# Altium PCB KhoaSoDienTu.PcbDoc
Units mm, origin at the board's own origin, x right, y up, seen from the top; angles counter-clockwise.
Board outline 110.74 x 92.46 mm, 2 copper layers (Top Layer, Bottom Layer); 26 components, 29 nets, 102 pads, 175 vias.
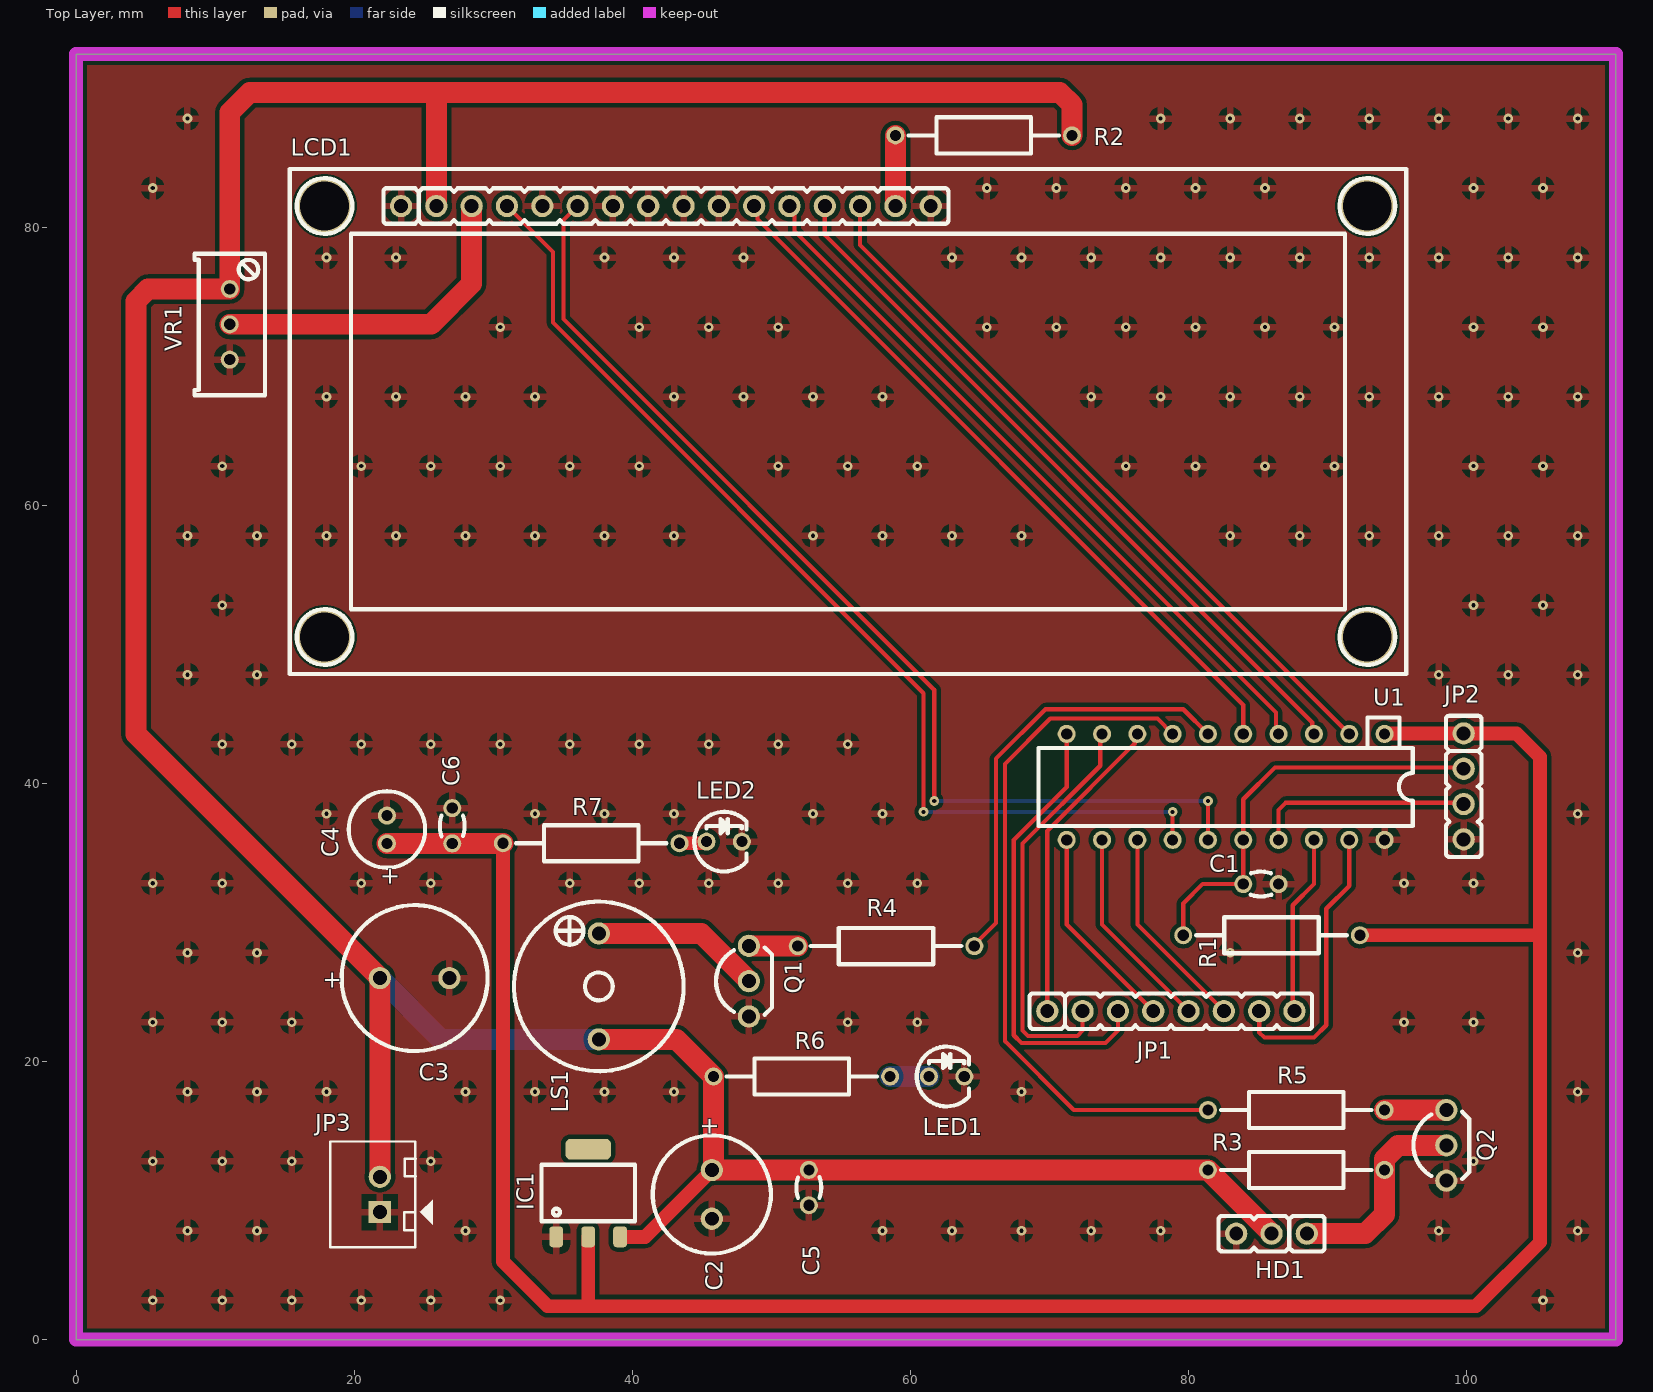
[diagram p0: Top Layer view]
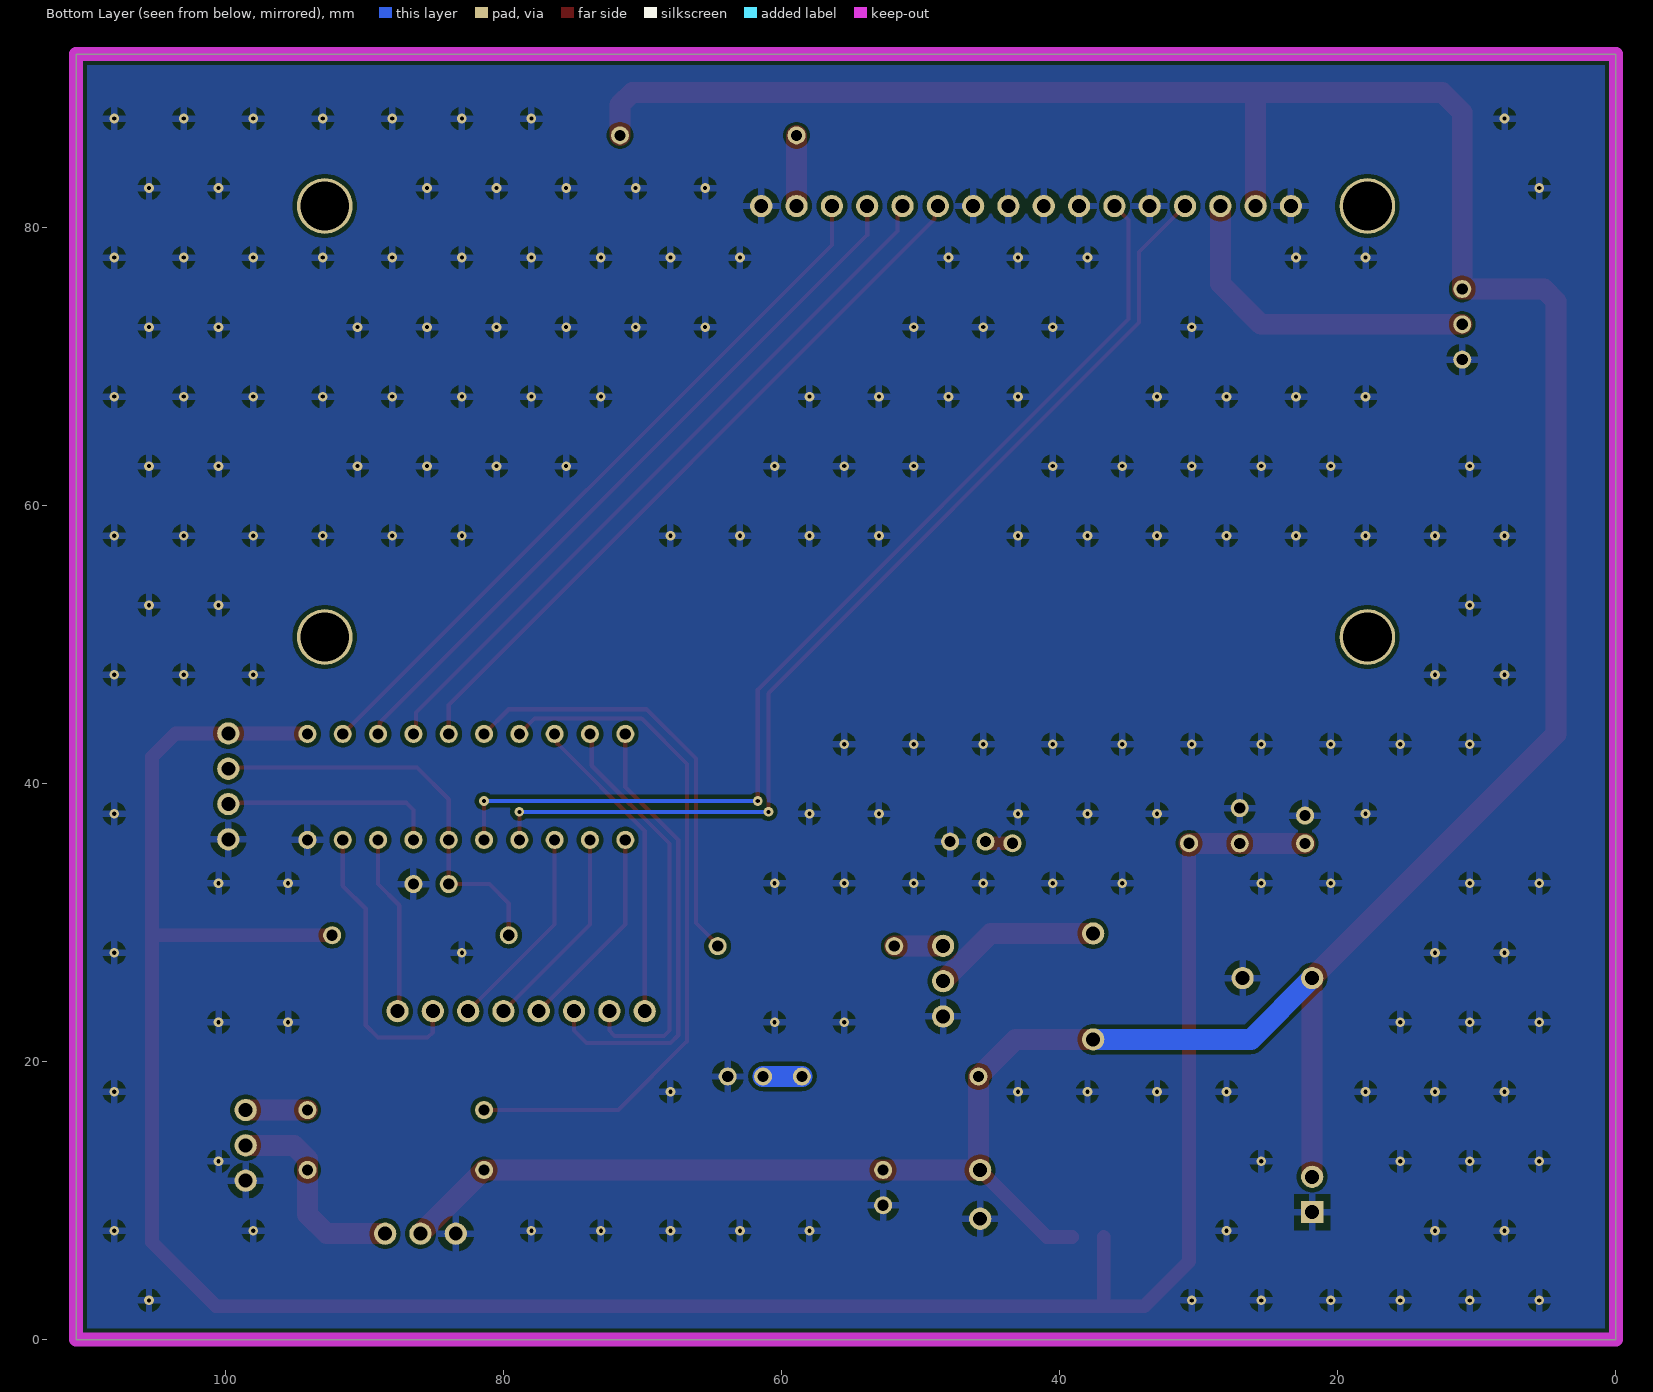
[diagram p1: Bottom Layer view, seen from below]
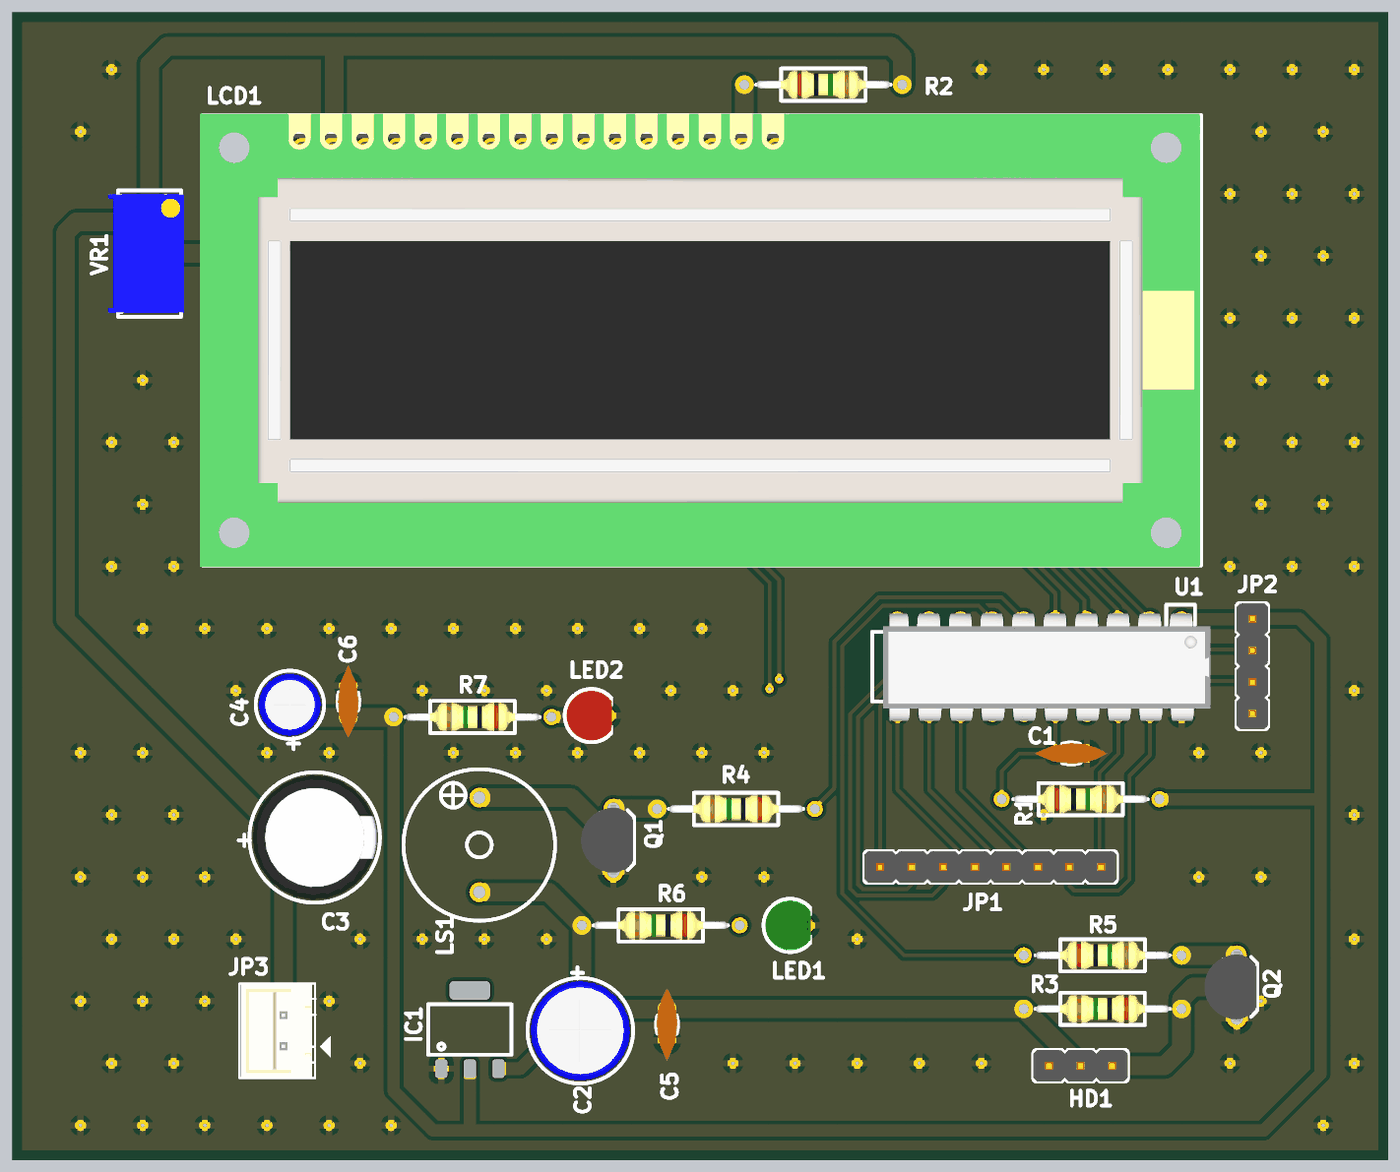
[diagram p2: 3D render of the assembled board from above, using the file's embedded part models]

## Layer stack, top to bottom
Top Solder: solder mask 0.0102, Solder Resist, Dk 3.5
Top Layer: signal copper 0.0356
Dielectric1: dielectric 0.32, FR-4, Dk 4.8
Bottom Layer: signal copper 0.0356
Bottom Solder: solder mask 0.0102, Solder Resist, Dk 3.5

## Board outline
0,0 0,92.456 110.744,92.456 110.744,0

## Design rules (kind name [scope] priority, off if disabled: settings)
Clearance [All] p1: gap=0.3 ignorepadtopadclearanceinfootprint=FALSE except(0.15: Arc-Arc Arc-Track Arc-SMDPad Arc-THPad Arc-Via Arc-Text Arc-Hole Track-Track Track-SMDPad Track-THPad Track-Via Track-Text Track-Hole SMDPad-SMDPad SMDPad-THPad SMDPad-Via SMDPad-Text SMDPad-Hole THPad-THPad THPad-Via THPad-Text THPad-Hole Via-Via Via-Text Via-Hole Text-Text Text-Hole)
PlaneConnect [All] p1: planeconnectstyle=Relief reliefexpansion=0.5 reliefentries=4 reliefconductorwidth=0.5 reliefairgap=0.5
PolygonConnect [All] p1: connectstyle=Relief reliefconductorwidth=0.5 reliefentries=4 polygonreliefangle="90 Angle" airgapwidth=0.5
RoutingVias RoutingVias_POWER [InNetClass('POWER')] p1: holewidth=0.3 width=0.7 viastyle="Through Hole" minholewidth=0.3 minwidth=0.7 maxholewidth=0.6 maxwidth=1.1
RoutingVias RoutingVias_SIGNAL [All] p2: holewidth=0.3 width=0.7 viastyle="Through Hole" minholewidth=0.3 minwidth=0.7 maxholewidth=0.3 maxwidth=0.7
SolderMaskExpansion [All] p1: expansion=0.102 istentingtop=FALSE
Width Width_POWER [InNetClass('POWER')] p1: maxlimit=2 minlimit=0.3 preferedwidth=1
Width Width_SIGNAL [All] p2: maxlimit=0.3 minlimit=0.3 preferedwidth=0.3
29 further rules are at their usual default settings.

## Classes and differential pairs
net class POWER: 3V3 5V NetHD1_1 NetLCD1_3 NetLCD1_15 NetLED1_1 NetLED2_1 NetLS1_1 NetQ1_3 NetQ2_3

## Components (designator, comment, footprint, x,y, rotation, side; value= is the part's Value field where it differs from the comment)
C1 "Cap" "Tu gom 104" 85.217,32.766 r0 top value=1nF
C2 "Cap Pol1" CAP_470UF_16V 45.72,12.192 r270 top value=470F/16V
C3 "Cap Pol1" CAP_470UF_25V 21.844,26 r0 top value=470F/25V
C4 "Cap Pol1" CAP_22UF_16V 22.352,35.687 r90 top value=22uF/16V
C5 "Cap" "Tu gom 104" 52.7,10.93 r90 top value=100nF
C6 "Cap" "Tu gom 104" 27.051,36.957 r270 top value=100nF
HD1 "Motor servo" Header_3 85.979,7.62 r180 top value="Header 3"
IC1 "AMS1117-3.3V" AMS1117-3.3V 36.83,10.541 r90 top
JP1 "Matrix key" Header_8 78.74,23.622 r0 top value="Connector 8"
JP2 "PROGRAM" Header_4 99.8,39.79 r270 top value="Connector 4"
JP3 "5VDC 2A" CON2 21.844,10.438 r90 top value="Connector 2"
LCD1 "LCD 16x2A" LCD16x2 23.368,81.534 r0 top value=LCD16x2A
LED1 "GREEN" LED3G 61.341,18.923 r0 top value="LED 3 ly Single Colour"
LED2 "RED" LED3R 45.339,35.814 r0 top value="LED 3 ly Single Colour"
LS1 "Speaker" SPEAKER 37.592,29.21 r270 top
Q1 "2SC1815" 2SC1815 48.387,25.781 r90 top
Q2 "2SC1815" 2SC1815 98.552,13.97 r90 top
R1 "Res2" "RES 1/4W CFR25" 79.629,29.083 r0 top value=47K
R2 "Res2" "RES 1/4W CFR25" 58.928,86.614 r0 top value=330R
R3 "Res2" "RES 1/4W CFR25" 94.1,12.202 r180 top value=4K7
R4 "Res2" "RES 1/4W CFR25" 64.6,28.3 r180 top value=4K7
R5 "Res2" "RES 1/4W CFR25" 81.407,16.51 r0 top value=4K7
R6 "Res2" "RES 1/4W CFR25" 58.547,18.923 r180 top value=330R
R7 "Res2" "RES 1/4W CFR25" 43.4,35.7 r180 top value=39R
U1 "MSP430G2553_PW_2" MSP430G2553 82.677,39.751 r180 top value=Value
VR1 "10K" VR1 11.049,75.565 r270 top value="VR 10K"

## Footprints (in the part's own frame and the unit in brackets; to place one, negate y for a bottom-side part, rotate by r counter-clockwise, add the part's x,y. Pads: shape width x height; smd on the part's side, far side on the other; paste and mask are expansions set on the pad)
2SC1815 [mm] "TO-92 Bent Lead, Flat Index; 3 In-Line, Axial Leads; Body Dia. 4.5mm; Leads 0.51 x 0.48 mm (max)"
  round 1.6 hole 1 mask+0.1: 1(-2.54,0) 2(0,0)
  round 1.6 hole 1: 3(2.54,0)
  silkscreen extent -2.41,-1.65 2.41,2.37, body extent -2.79,-1.59 2.79,2.61, height 10
AMS1117-3.3V [mm] "SOT223, 4-Leads, Body 6.7x7.3mm (max), Pitch 2.30mm, IPC Medium Density"
  rrect50% 1.5x1 smd: 1(-3.15,2.3) 2(-3.15,0) 3(-3.15,-2.3)
  rrect50% 1.5x3.28 smd: 4(3.15,0)
  silkscreen extent -2.03,-3.35 2.03,3.35
CAP_22UF_16V [mm] "Capacitor, Electrolytic, Radial; Body 5 x 11 mm (Dia.xH typ); Pin Spacing 2 mm (typ)"
  round 1.3 hole 0.8: 1(0,0) 2(2,0)
  silkscreen extent -1.75,-2.75 3.75,2.75, body extent -1.53,-2.53 3.53,2.53, height 11.53
CAP_470UF_16V [mm] "Capacitor, Electrolytic, Radial; Body 8 x 11.5 mm (Dia.xH typ); Pin Spacing 3.5 mm (typ)"
  round 1.6 hole 1: 1(0,0) 2(3.5,0)
  silkscreen extent -2.5,-4.25 6,4.25, body extent -2.28,-4.03 5.78,4.03, height 12.03
CAP_470UF_25V [mm] "Capacitor, Electrolytic, Radial; Body 10 x 12.5 mm (Dia.xH typ); Pin Spacing 5 mm (typ)"
  round 1.6 hole 1: 1(0,0) 2(5,0)
  silkscreen extent -2.75,-5.25 7.75,5.25, body extent -2.5,-4.99 7.5,4.99, height 14.1
CON2 [mm] "CON2"
  rect 1.6x1.6 hole 1 mask+0.1: 1(-1.27,0)
  round 1.6 hole 1 mask+0.1: 2(1.27,0)
  silkscreen extent -3.81,-3.8 3.81,3.56, body extent -3.75,-2.29 3.75,3.41, height 7
Header_3 [mm] "Connector DIP, 3Pin_2.54mm"
  round 1.6 hole 1 mask+0.1: 1(-2.54,0) 2(0,0) 3(2.54,0)
  silkscreen extent -3.81,-1.28 3.81,1.28, body extent -3.81,-1.27 3.81,1.27, height 10.1
Header_4 [mm] "Connector DIP, 4Pin_2.54mm"
  round 1.6 hole 1 mask+0.1: 1(-3.81,0) 2(-1.27,0) 3(1.27,0) 4(3.81,0)
  silkscreen extent -5.08,-1.28 5.08,1.28, body extent -5.08,-1.27 5.08,1.27, height 10.1
Header_8 [mm] "Connector DIP Male, 8Pin_2.54mm"
  round 1.6 hole 1 mask+0.1: 1(-8.89,0) 2(-6.35,0) 3(-3.81,0) 4(-1.27,0) 5(1.27,0) 6(3.81,0) 7(6.35,0) 8(8.89,0)
  silkscreen extent -10.16,-1.28 10.16,1.28, body extent -10.16,-1.27 10.16,1.27, height 10.1
LCD16x2 [mm] "LCD 16x2, 36.3mmx80.3mm"
  round 1.6 hole 1 mask+0.1: 1(0,0) 2(2.54,0) 3(5.08,0) 4(7.62,0) 5(10.16,0) 6(12.7,0) 7(15.24,0) 8(17.78,0) 9(20.32,0) 10(22.86,0) 11(25.4,0) 12(27.94,0) 13(30.48,0) 14(33.02,0) 15(35.56,0) 16(38.1,0)
  round 4 hole 3.5: Hole_0(-5.5,0) Hole_1(-5.5,-31) Hole_3(69.5,-31) Hole_4(69.5,0)
  silkscreen extent -8,-33.65 72.3,2.65, body extent -8.25,-33.75 72.25,2.75, height 10.52
LED3G [mm] "LED 3mm_GREEN"
  round 1.3 hole 0.8: 1(0,0) 2(2.54,0)
  silkscreen extent -0.88,-2.15 2.87,2.15, body extent -0.73,-2 2.94,2, height 4.6
LED3R [mm] "LED 3mm_RED"
  round 1.3 hole 0.8: 1(0,0) 2(2.54,0)
  silkscreen extent -0.88,-2.15 2.87,2.15, body extent -0.73,-2 2.94,2, height 4.6
MSP430G2553 [mm] "DIP 20, 20 PIN, W 300mil, Pin to pin 100mil"
  round 1.3 hole 0.8: 1(-11.43,-3.81) 2(-8.89,-3.81) 3(-6.35,-3.81) 4(-3.81,-3.81) 5(-1.27,-3.81) 6(1.27,-3.81) 7(3.81,-3.81) 8(6.35,-3.81) 9(8.89,-3.81) 10(11.43,-3.81) 11(11.43,3.81) 12(8.89,3.81) 13(6.35,3.81) 14(3.81,3.81) 15(1.27,3.81) 16(-1.27,3.81) 17(-3.81,3.81) 18(-6.35,3.81) 19(-8.89,3.81) 20(-11.43,3.81)
  silkscreen extent -13.46,-5 13.46,2.8, body extent -13.74,-4.27 12.57,4.37, height 3.94
"RES 1/4W CFR25" [mm] "Axial Device, Thru-Hole; 2 Leads fi 0.55"
  round 1.3 hole 0.8 mask+0.1: 1(0,0) 2(12.7,0)
  silkscreen extent 0.94,-1.3 11.76,1.3, body extent 0.97,-1.16 11.74,1.16, height 2.93
SPEAKER [mm] "TMB12A05"
  round 1.6 hole 1 mask+0.1: 1(0,0) 2(7.62,0)
  silkscreen extent -2.29,-6.1 9.91,6.1
"Tu gom 104" [mm] "Capacitor, Radial, Tantalum, Non-Polarised; Body 3.05 x 1.78 x 3.43 mm (WxTxH max); Pin Spacing 2.54 mm (typ)"
  round 1.3 hole 0.8: 1(-1.27,0) 2(1.27,0)
  silkscreen extent -0.73,-0.89 0.76,0.89, body extent -2.92,-0.85 2.92,0.85, height 6.42
VR1 [mm] "Variable Resistor"
  round 1.3 hole 0.8 mask+0.1: 1(0,0) 2(2.54,0) 3(5.08,0)
  silkscreen extent -2.54,-2.54 7.65,2.54, body extent -2.22,-3.3 7.3,2.79, height 11.56

## Part data
C1 C5 C6: "Capacitor", LatestRevisionDate=17-Jul-2002, LatestRevisionNote="Re-released for DXP Platform.", PackageDescription="Radial Cap, Thru-Hole; 2 Leads; 0.3 in Pin Spacing", PackageReference=RAD-0.3, Published=8-Jun-2000, Publisher="Altium Limited"
C2 C3 C4: "Polarized Capacitor (Radial)", LatestRevisionDate=17-Jul-2002, LatestRevisionNote="Re-released for DXP Platform.", PackageDescription="Polarized Capacitor (Radial); 2 Leads", PackageReference=RB7.6-15, Published=8-Jun-2000, Publisher="Altium Limited"
HD1: library part Hed3, "Header 3 (Green)"
IC1: library part AMS1117
JP1: library part Con8, "Connector 8"
JP2: library part Con4, "Connector 4"
JP3: library part Con2, "Connector 2"
LCD1: library part LCD16x2A, "LCD dipslay 16 char, 2 line"
LED1 LED2: library part LED, "LED Single colour Green and Red"
LS1: "Loudspeaker", LatestRevisionDate=17-Jul-2002, LatestRevisionNote="Re-released for DXP Platform.", PackageReference=PIN2, Published=24-Mar-1999, Publisher="Altium Limited"
Q1 Q2: "Trans NPN 50V 150mA TO-92", ComponentLink1Description=Datasheet, ComponentLink1URL="D:\Dropbox\Datasheets\Transistors\P Channel Bipolar\2SC1815.pdf", Unit Price=0.0143
R1 R2 R3 R4 R5 R6 R7: "Resistor", LatestRevisionDate=17-Jul-2002, LatestRevisionNote="Re-released for DXP Platform.", PackageDescription="Axial Device, Thru-Hole; 2 Leads; 0.4 in Pin Spacing", PackageReference=AXIAL-0.4, Published=8-Jun-2000, Publisher="Altium Limited"
U1: "Imported", Manufacturer="Texas Instruments", Manufacturer_Part_Number=msp430g2553_pw_20, PACKAGE_DESIGNATOR=PW, Datasheet URL=http://www.ti.com/lit/gpn/MSP430G2553, FAMILY_NAME="Value Line", GENERIC_PART_NUMBER=MSP430G2553, INDUSTRY_STD_PKG_TYPE=TSSOP, PIN_COUNT=20, RefDes=RefDes, Type=DEV, Vendor="Texas Instruments"
VR1: library part VR1, "Var Resistor"

## Via types
v1: diameter 0.7, hole 0.3, Top Layer to Bottom Layer, 175 vias

## Nets (pads, with @x,y where several pads share a name; then routed paths per layer and width w, separated by ;. In a path a pad name is that pad's centre, name@x,y a point inside that pad or via, vN(x,y) a via of type N, cw(c..) or ccw(c..) an arc to the next point about the centre after c; other vN are vias at no path point)
3V3: C4.1 C6.2 IC1.2 JP2.1 R1.2 R7.2 U1.1 | length 181.1
  Top Layer w1: R7.2 30.7,5.6 33.9,2.4 36.8,2.4 ; IC1.2 36.83,2.43 36.8,2.4 ; R1.2 105.3,29.083 ; U1.1 94.126,43.58 99.781,43.58 JP2.1 103.6,43.6 105.3,41.9 105.3,29.083 ; 36.8,2.4 100.7,2.4 105.3,7 105.3,29.083
  Top Layer w1.5: C4.1 C6.2 30.687,35.687 R7.2
5V: C2.1 C3.1 C5.2 HD1.2 IC1.3 JP3.2 LCD1.2 LS1.2 R2.2 R3.2 R6.2 VR1.1 | length 246.3
  Top Layer w1: IC1.3 40.919,7.391 C2.1
  Top Layer w1.5: JP3.2 C3.1 4.3,43.544 4.3,74.686 5.179,75.565 VR1.1 11.049,88.265 12.484,89.7 70.749,89.7 71.628,88.821 R2.2 ; LCD1.2 25.908,89.6 ; LS1.2 43.18,21.59 R6.2 45.847,12.346 45.72,12.219 C2.1 52.692,12.192 C5.2 81.398,12.2 R3.2 85.979,7.623 HD1.2
  Bottom Layer w1.5: C3.1 26.254,21.59 LS1.2
DATA4: LCD1.11 U1.5 | length 52.5
  Top Layer w0.3: LCD1.11 49.001,81.301 49.001,80.599 83.947,45.653 U1.5
DATA5: LCD1.12 U1.4 | length 52.5
  Top Layer w0.3: LCD1.12 51.308,81.182 51.671,80.819 51.671,79.729 86.296,45.104 86.296,43.752 U1.4
DATA6: LCD1.13 U1.3 | length 52.5
  Top Layer w0.3: LCD1.13 53.848,79.452 88.905,44.395 88.905,43.683 U1.3
DATA7: LCD1.14 U1.2 | length 52.5
  Top Layer w0.3: LCD1.14 56.388,78.74 U1.2
GND: C1.2 C2.2 C3.2 C4.2 C5.1 C6.1 HD1.3 IC1.1 JP2.4 JP3.1 LCD1.1 LCD1.5 LCD1.7 LCD1.8 LCD1.9 LCD1.10 LCD1.16 LED1.2 LED2.2 Q1.1 Q2.1 U1.20 VR1.3
  other v1: 5.503,2.822 10.503,2.822 15.503,2.822 20.503,2.822 25.503,2.822 30.503,2.822 105.503,2.822 8.003,7.822 13.003,7.822 28.003,7.822 58.003,7.822 63.003,7.822 68.003,7.822 73.003,7.822 78.003,7.822 98.003,7.822 108.003,7.822 5.503,12.822 10.503,12.822 15.503,12.822 25.503,12.822 100.503,12.822 8.003,17.822 13.003,17.822 18.003,17.822 28.003,17.822 33.003,17.822 38.003,17.822 43.003,17.822 68.003,17.822 108.003,17.822 5.503,22.822 10.503,22.822 15.503,22.822 55.503,22.822 60.503,22.822 95.503,22.822 100.503,22.822 8.003,27.822 13.003,27.822 83.003,27.822 108.003,27.822 5.503,32.822 10.503,32.822 20.503,32.822 25.503,32.822 35.503,32.822 40.503,32.822 45.503,32.822 50.503,32.822 55.503,32.822 60.503,32.822 95.503,32.822 100.503,32.822 18.003,37.822 33.003,37.822 38.003,37.822 43.003,37.822 53.003,37.822 58.003,37.822 108.003,37.822 10.503,42.822 15.503,42.822 20.503,42.822 25.503,42.822 30.503,42.822 35.503,42.822 40.503,42.822 45.503,42.822 50.503,42.822 55.503,42.822 8.003,47.822 13.003,47.822 98.003,47.822 103.003,47.822 108.003,47.822 10.503,52.822 100.503,52.822 105.503,52.822 8.003,57.822 13.003,57.822 18.003,57.822 23.003,57.822 28.003,57.822 33.003,57.822 38.003,57.822 43.003,57.822 53.003,57.822 58.003,57.822 63.003,57.822 68.003,57.822 83.003,57.822 88.003,57.822 93.003,57.822 98.003,57.822 103.003,57.822 108.003,57.822 10.503,62.822 20.503,62.822 25.503,62.822 30.503,62.822 35.503,62.822 40.503,62.822 50.503,62.822 55.503,62.822 60.503,62.822 75.503,62.822 80.503,62.822 85.503,62.822 90.503,62.822 100.503,62.822 105.503,62.822 18.003,67.822 23.003,67.822 28.003,67.822 33.003,67.822 43.003,67.822 48.003,67.822 53.003,67.822 58.003,67.822 73.003,67.822 78.003,67.822 83.003,67.822 88.003,67.822 93.003,67.822 98.003,67.822 103.003,67.822 108.003,67.822 30.503,72.822 40.503,72.822 45.503,72.822 50.503,72.822 65.503,72.822 70.503,72.822 75.503,72.822 80.503,72.822 85.503,72.822 90.503,72.822 100.503,72.822 105.503,72.822 18.003,77.822 23.003,77.822 38.003,77.822 43.003,77.822 48.003,77.822 63.003,77.822 68.003,77.822 73.003,77.822 78.003,77.822 83.003,77.822 88.003,77.822 93.003,77.822 98.003,77.822 103.003,77.822 108.003,77.822 5.503,82.822 65.503,82.822 70.503,82.822 75.503,82.822 80.503,82.822 85.503,82.822 100.503,82.822 105.503,82.822 8.003,87.822 78.003,87.822 83.003,87.822 88.003,87.822 93.003,87.822 98.003,87.822 103.003,87.822 108.003,87.822
KEY1: JP1.1 U1.8 | length 22.6
  Top Layer w0.3: JP1.1 69.85,36.576 76.136,42.862 76.136,43.37 U1.8
KEY2: JP1.2 U1.9 | length 29.7
  Top Layer w0.3: JP1.2 72.39,22.225 72.009,21.844 68.453,21.844 68.072,22.225 68.072,35.687 73.66,41.275 73.66,43.434 U1.9
KEY3: JP1.3 U1.10 | length 32.7
  Top Layer w0.3: U1.10 71.247,39.751 67.437,35.941 67.437,21.893 67.994,21.336 74.041,21.336 74.93,22.225 JP1.3
KEY4: JP1.4 U1.11 | length 14.9
  Top Layer w0.3: U1.11 71.247,29.845 JP1.4
KEY5: JP1.5 U1.12 | length 14.9
  Top Layer w0.3: U1.12 73.787,29.845 JP1.5
KEY6: JP1.6 U1.13 | length 14.9
  Top Layer w0.3: U1.13 76.327,29.845 JP1.6
KEY7: JP1.7 U1.19 | length 20.9
  Top Layer w0.3: JP1.7 85.09,22.098 85.471,21.717 89.027,21.717 89.916,22.606 89.916,30.988 91.567,32.639 U1.19
KEY8: JP1.8 U1.18 | length 13
  Top Layer w0.3: JP1.8 87.503,23.749 87.503,31.242 89.027,32.766 U1.18
LCD_EN: LCD1.6 U1.15 | length 76.6
  Top Layer w0.3: LCD1.6 35.052,80.518 35.052,73.406 61.722,46.736 v1(61.722,38.735) ; U1.15 v1@81.407,38.608
  Bottom Layer w0.3: v1(61.722,38.735) v1(81.407,38.735)
LCD_RS: LCD1.4 U1.14 | length 76
  Top Layer w0.3: LCD1.4 34.29,78.232 34.29,73.152 60.95,46.492 v1(60.95,37.958) ; U1.14 v1(78.867,37.958)
  Bottom Layer w0.3: v1(60.95,37.958) v1(78.867,37.958) v1@78.841,37.984 ; v1@60.95,37.995 v1@60.961,37.984
MOTOR: R5.1 U1.7 | length 50.5
  Top Layer w0.3: U1.7 77.767,44.661 70.061,44.661 66.802,41.402 66.802,21.463 71.755,16.51 R5.1
NetHD1_1: HD1.1 Q2.2 R3.1 | length 15
  Top Layer w1.5: HD1.1 92.72,7.62 94.1,9 R3.1 94.1,13 95.07,13.97 Q2.2
NetLCD1_3: LCD1.3 VR1.2 | length 24.2
  Top Layer w1.5: VR1.2 25.527,73.025 28.448,75.946 LCD1.3
NetLCD1_15: LCD1.15 R2.1 | length 5.1
  Top Layer w1.5: LCD1.15 R2.1
NetLED1_1: LED1.1 R6.1 | length 2.8
  Bottom Layer w1.5: R6.1 LED1.1
NetLED2_1: LED2.1 R7.1 | length 2
  Top Layer w1: R7.1 45.144,35.7 45.258,35.814 LED2.1
NetLS1_1: LS1.1 Q1.2 | length 12.2
  Top Layer w1.5: LS1.1 44.958,29.21 Q1.2
NetQ1_3: Q1.3 R4.2 | length 3.5
  Top Layer w1.5: Q1.3 51.879,28.321 R4.2
NetQ2_3: Q2.3 R5.2 | length 4.4
  Top Layer w1.5: R5.2 Q2.3
RST: C1.1 JP2.2 R1.1 U1.16 | length 30.1
  Top Layer w0.3: R1.1 79.629,31.369 81.026,32.766 C1.1 U1.16 83.947,38.862 86.233,41.148 JP2.2@99.822,41.148
SPEAKER: R4.1 U1.6 | length 31.4
  Top Layer w0.3: R4.1@64.643,28.448 66.167,29.972 66.167,41.783 69.723,45.339 79.629,45.339 U1.6
TEST: JP2.3 U1.17 | length 15.7
  Top Layer w0.3: U1.17 86.487,38.1 86.995,38.608 JP2.3@99.822,38.608
pads on no net: IC1.4 LCD1.Hole_0 LCD1.Hole_1 LCD1.Hole_3 LCD1.Hole_4

## Polygon pours and split planes (outlines as drawn)
GND on Bottom Layer "GND_L02_P000" (solid, remove dead copper, pour order 0): 0.2,0.2 0,0.4 0,92.456 110.744,92.456 110.744,0
GND on Top Layer "GND_L01_P001" (solid, remove dead copper, pour order 1): 0.2,0.2 110.544,0.2 110.744,0 110.744,92.456 0,92.456

## Keep-outs
Keep-Out Layer:
  the board outline again, w1

## Dimensions
0,0 to 110.744,0 on Mechanical 10
0,0 to 0,92.456 on Mechanical 10

## Text inside footprints (layer, text, board x,y; h text height)
C2: Top Overlay "+" at 45.02,16.042 h1.2 r270; Mechanical 1 "2" at 45.12,9.042 h1.2 r270; Mechanical 1 "1" at 45.12,12.442 h1.2 r270; Mechanical 1 "+" at 45.02,14.242 h1.5 r270
C3: Top Overlay "+" at 17.744,25.3 h1.2; Mechanical 1 "2" at 26.444,25.4 h1.2; Mechanical 1 "1" at 21.644,25.5 h1.2; Mechanical 1 "+" at 19.644,25.2 h1.5
C4: Top Overlay "+" at 23.114,32.623 h1.2 r90; Mechanical 1 "2" at 22.852,37.387 h1 r90; Mechanical 1 "1" at 22.852,35.487 h1 r90; Mechanical 1 "+" at 22.852,34.187 h1 r90
HD1: Mechanical 1 "1" at 88.773,7.874 h1.2 r180; Mechanical 1 "3" at 83.693,7.874 h1.2 r180
IC1: Mechanical 1 "3" at 38.72,8.966 h1.2; Mechanical 1 "2" at 36.515,8.966 h1.2; Mechanical 1 "1" at 34.31,8.966 h1.2
JP1: Mechanical 1 "1" at 69.64,23.222 h1.2; Mechanical 1 "8" at 87.34,23.222 h1.2
JP2: Mechanical 1 "4" at 99.546,36.234 h1.2 r270; Mechanical 1 "1" at 99.546,43.854 h1.2 r270
LCD1: Mechanical 1 "1" at 23.218,81.134 h1.2; Mechanical 1 "16" at 60.918,81.134 h1.2
LS1: Mechanical 1 "1" at 37.092,29.41 h1.2 r270; Mechanical 1 "2" at 36.992,21.89 h1.2 r270
Q1: Mechanical 1 "E" at 48.768,22.987 h0.8 r90; Mechanical 1 "C" at 48.768,25.527 h0.8 r90; Mechanical 1 "B" at 48.768,28.067 h0.8 r90
Q2: Mechanical 1 "B" at 98.933,16.256 h0.8 r90; Mechanical 1 "C" at 98.933,13.716 h0.8 r90; Mechanical 1 "E" at 98.933,11.176 h0.8 r90
U1: Mechanical 1 "20" at 95.077,38.451 h1.2 r180; Mechanical 1 "11" at 71.977,38.451 h1.2 r180; Mechanical 1 "10" at 71.977,42.151 h1.2 r180; Mechanical 1 "1" at 94.377,42.251 h1.2 r180
VR1: Mechanical 1 "3" at 10.539,70.795 h1 r270; Mechanical 1 "2" at 10.519,73.325 h1 r270; Mechanical 1 "1" at 10.559,75.705 h1 r270